# Altium PCB nrf24l01_cell(P40).PcbDoc (part 4 of 11)
Units mm, origin at the board's own origin, x right, y up, seen from the top; angles counter-clockwise.
Board outline 136.2 x 112.2 mm, 2 copper layers (TopLayer, BottomLayer); 520 components, 0 nets, 2804 pads, 1040 vias.
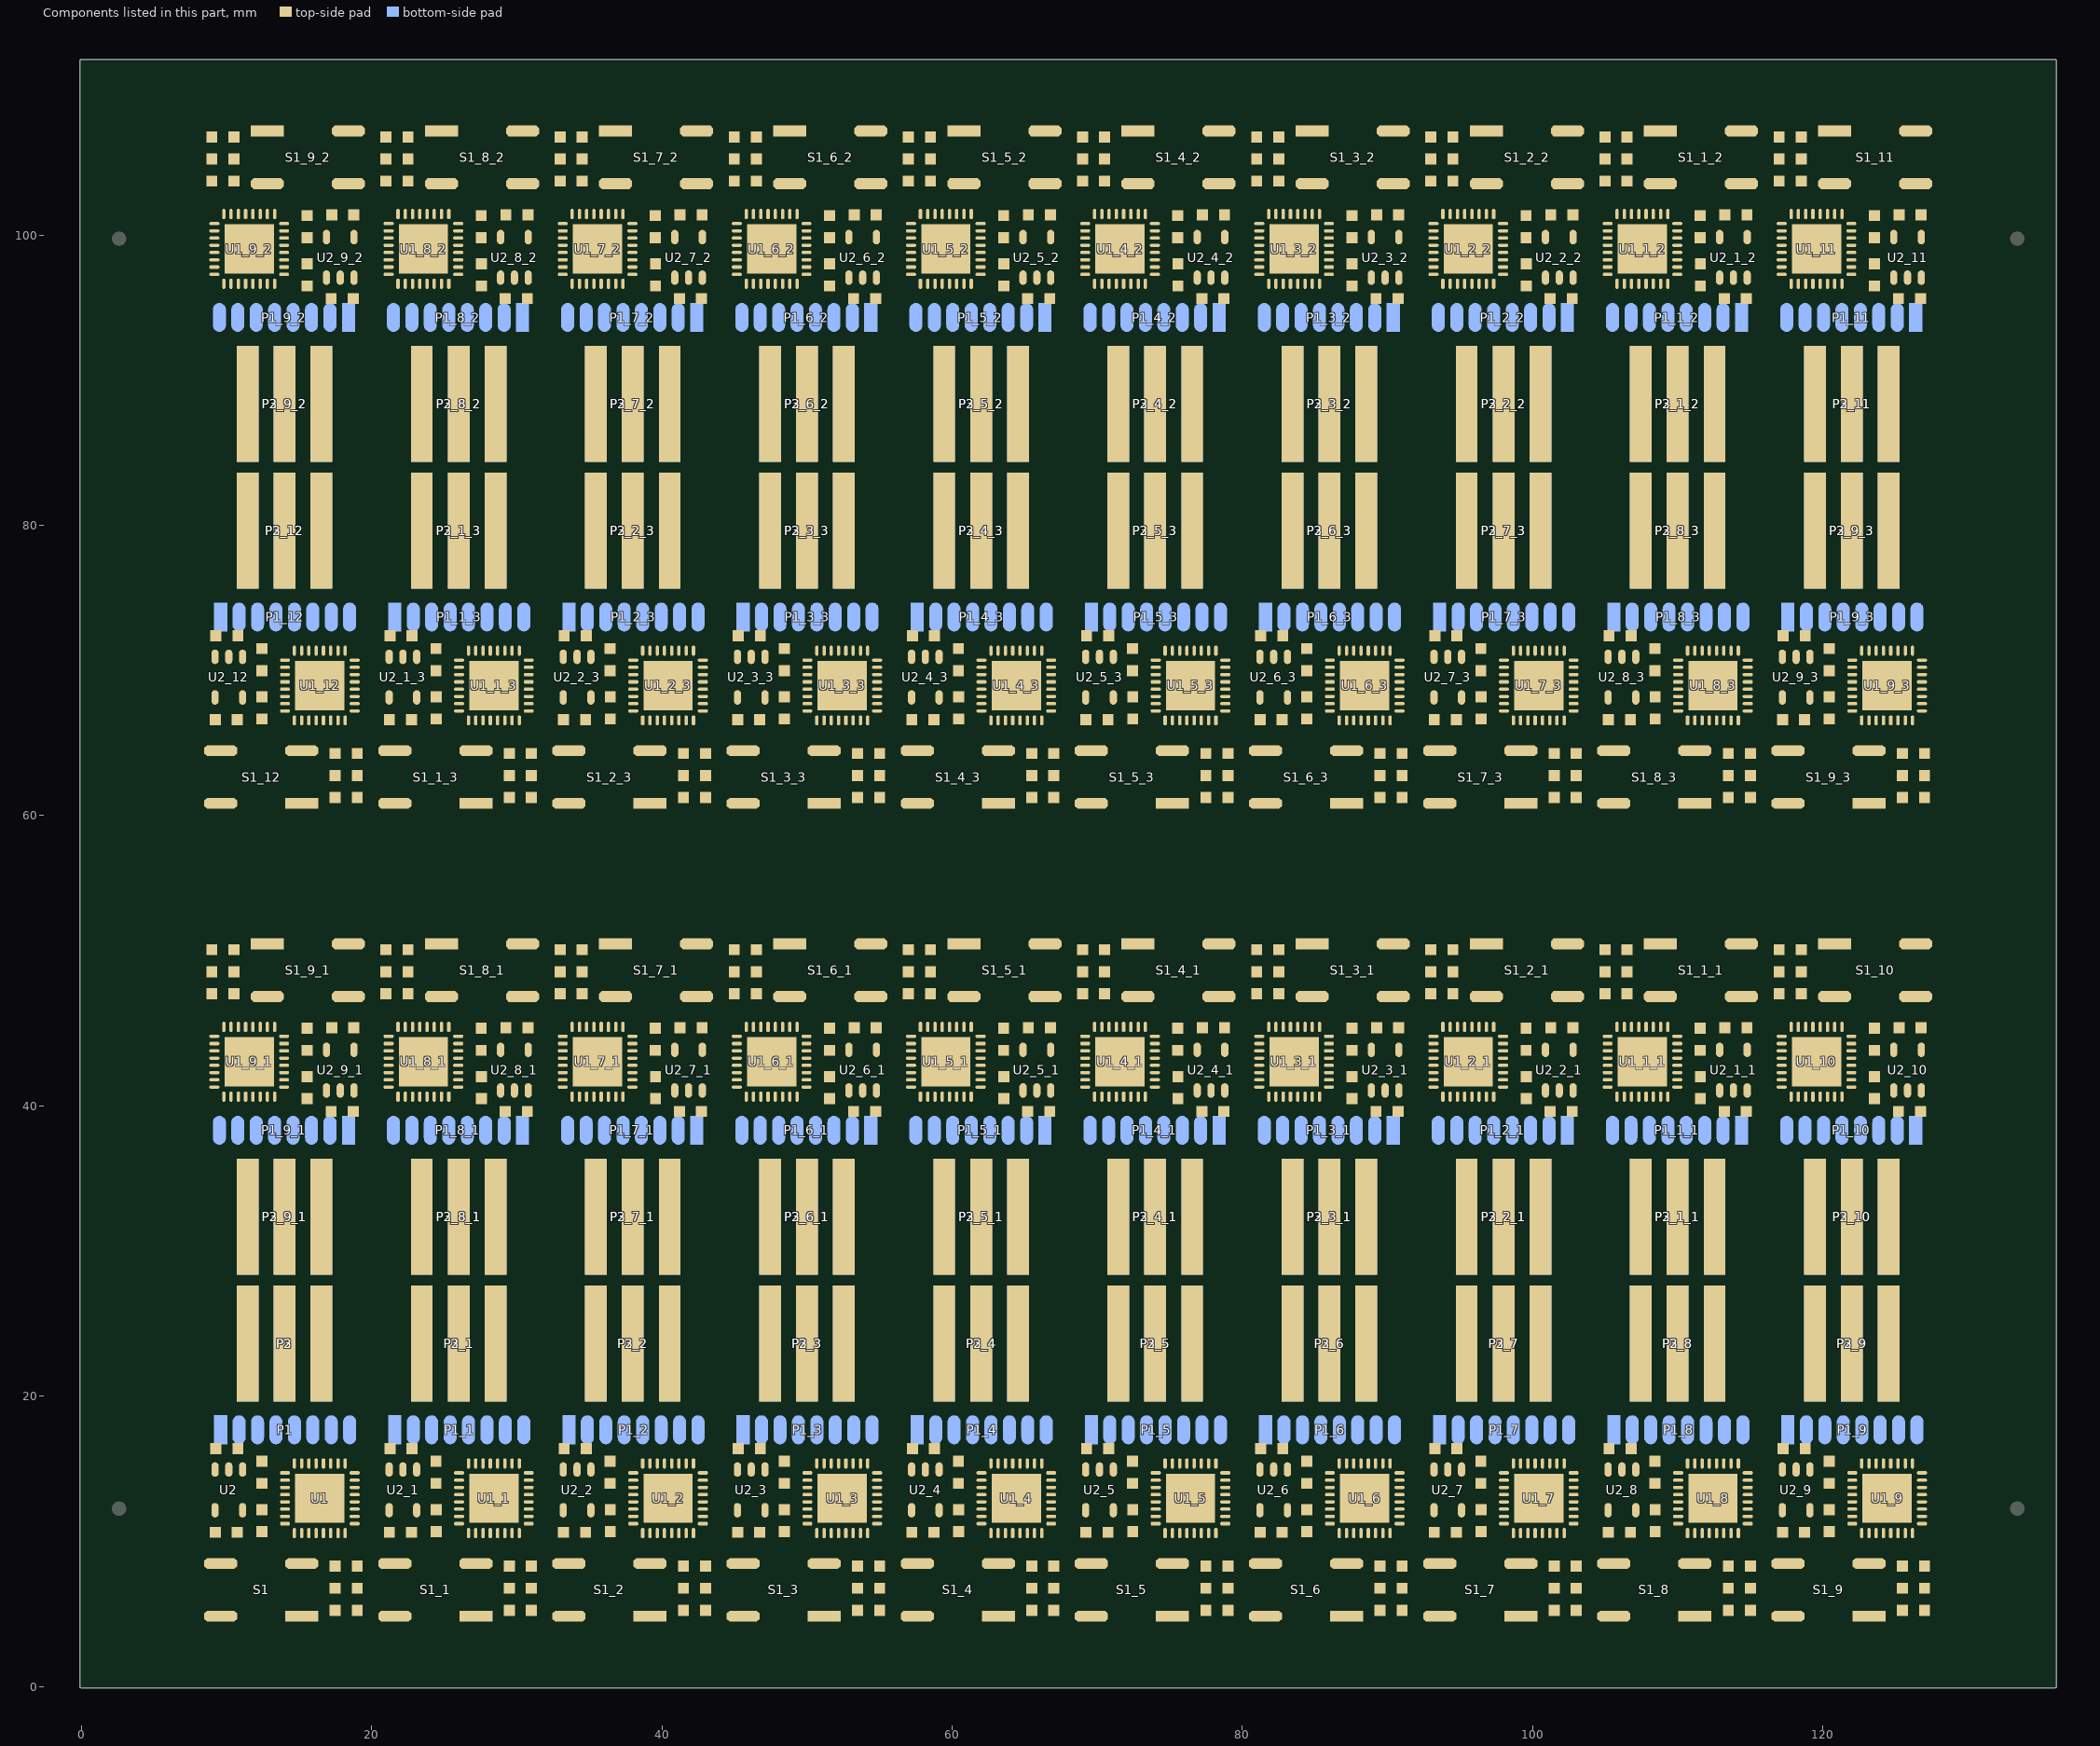
[diagram p4: the components of this part, seen from the top]

## Via types
v1: diameter 0.4, hole 0.2, TopLayer to BottomLayer, tented both sides, 1040 vias

## Nets (pads, with @x,y where several pads share a name; then routed paths per layer and width w, separated by ;. In a path a pad name is that pad's centre, name@x,y a point inside that pad or via, vN(x,y) a via of type N, cw(c..) or ccw(c..) an arc to the next point about the centre after c; other vN are vias at no path point) (continued)
copper on no net: (continued)
  TopLayer w0.203: 40.785,100.215 ccw(c40.532,100.468) 40.89,100.468 ccw(c41.248,100.468) 40.995,100.215 ; 40.89,43.86 40.89,44.56 ; 40.89,44.484 cw(c41.557,44.484) 41.341,45.116 ; 40.89,44.769 cw(c41.46,44.769) 41.275,45.308 ; 40.89,45.054 cw(c41.362,45.054) 41.209,45.5 ; 40.89,99.86 40.89,100.56 ; 40.89,100.484 cw(c41.557,100.484) 41.341,101.116 ; 40.89,100.769 cw(c41.46,100.769) 41.275,101.308 ; 40.89,101.054 cw(c41.362,101.054) 41.209,101.5 ; 40.985,20.38 ccw(c42.567,20.38) 41.448,19.262 ; 40.985,76.38 ccw(c42.567,76.38) 41.448,75.262 ; v1@41.042,37.37 ccw(c40.804,37.37) 40.972,37.538 ccw(c41.14,37.706) v1@41.14,37.468 ; v1@41.042,93.37 ccw(c40.804,93.37) 40.972,93.538 ccw(c41.14,93.706) v1@41.14,93.468 ; 41.188,20.38 ccw(c43.261,20.38) 41.795,18.915 ; 41.188,35.62 cw(c41.981,35.62) 41.421,36.181 ; 41.188,76.38 ccw(c43.261,76.38) 41.795,74.915 ; 41.188,91.62 cw(c41.981,91.62) 41.421,92.181 ; 41.25,45.38 40.89,45.02 40.89,44.56 ; 41.25,101.38 40.89,101.02 40.89,100.56 ; 41.288,8.082 ccw(c40.811,7.605) 40.811,8.28 ccw(c40.811,8.955) 41.288,8.478 ; 41.288,64.082 ccw(c40.811,63.605) 40.811,64.28 ccw(c40.811,64.955) 41.288,64.478 ; 41.49,6.76 42.21,7.48 42.21,9.16 41.68,9.69 41.68,10.56 ; 41.49,7.039 ccw(c41.49,7.714) 41.967,7.237 ccw(c42.444,6.76) 41.769,6.76 ; 41.49,62.76 42.21,63.48 42.21,65.16 41.68,65.69 41.68,66.56 ; 41.49,63.039 ccw(c41.49,63.714) 41.967,63.237 ccw(c42.444,62.76) 41.769,62.76 ; 42.18,15.36 42.18,16.579 40.311,18.447 36.91,18.447 36.717,18.64 v1@36.19,18.64 ; 42.18,71.36 42.18,72.579 40.311,74.447 36.91,74.447 36.717,74.64 v1@36.19,74.64 ; 42.536,39.422 cw(c42.059,38.945) 42.734,38.945 cw(c43.409,38.945) 42.932,39.422 ; 42.536,39.818 ccw(c42.059,40.295) 42.734,40.295 ccw(c43.409,40.295) 42.932,39.818 ; 42.536,95.422 cw(c42.059,94.945) 42.734,94.945 cw(c43.409,94.945) 42.932,95.422 ; 42.536,95.818 ccw(c42.059,96.295) 42.734,96.295 ccw(c43.409,96.295) 42.932,95.818 ; 42.685,41.415 ccw(c42.432,41.668) 42.79,41.668 ccw(c43.148,41.668) 42.895,41.415 ; 42.685,97.415 ccw(c42.432,97.668) 42.79,97.668 ccw(c43.148,97.668) 42.895,97.415 ; 42.734,40.317 cw(c43.283,40.317) 42.895,40.705 ; 42.734,96.317 cw(c43.283,96.317) 42.895,96.705 ; 42.812,8.478 ccw(c42.335,8.955) 43.01,8.955 ccw(c43.685,8.955) 43.208,8.478 ; 42.812,64.478 ccw(c42.335,64.955) 43.01,64.955 ccw(c43.685,64.955) 43.208,64.478 ; 42.83,11.21 42.83,10.52 43.01,10.34 43.01,8.28 ; 42.83,12.21 v1(43.45,12.21) v1@43.52,12.21 ; 42.83,67.21 42.83,66.52 43.01,66.34 43.01,64.28 ; 42.83,68.21 v1(43.45,68.21) v1@43.52,68.21 ; v1@42.92,9.72 cw(c42.704,9.504) 43.01,9.504 ; v1@42.92,9.86 ccw(c42.704,10.076) 43.01,10.076 ; v1@42.92,65.72 cw(c42.704,65.504) 43.01,65.504 ; v1@42.92,65.86 ccw(c42.704,66.076) 43.01,66.076 ; v1@43.212,38.07 cw(c42.974,38.07) 43.142,37.902 cw(c43.31,37.734) v1@43.31,37.972 ; v1@43.212,94.07 cw(c42.974,94.07) 43.142,93.902 cw(c43.31,93.734) v1@43.31,93.972 ; v1@43.38,12.14 ccw(c43.212,11.972) 43.212,12.21 ccw(c43.212,12.448) v1@43.38,12.28 ; v1@43.38,17.85 ccw(c43.212,17.682) 43.212,17.92 ccw(c43.212,18.158) v1@43.38,17.99 ; v1@43.38,68.14 ccw(c43.212,67.972) 43.212,68.21 ccw(c43.212,68.448) v1@43.38,68.28 ; v1@43.38,73.85 ccw(c43.212,73.682) 43.212,73.92 ccw(c43.212,74.158) v1@43.38,73.99 ; v1@44.48,43.79 v1(44.55,43.79) 45.17,43.79 ; v1@44.48,99.79 v1(44.55,99.79) 45.17,99.79 ; v1(44.55,38.08) 45.21,38.08 47.46,35.83 ; v1(44.55,94.08) 45.21,94.08 47.46,91.83 ; v1@44.62,38.01 cw(c44.788,37.842) 44.788,38.08 cw(c44.788,38.318) v1@44.62,38.15 ; v1@44.62,43.72 cw(c44.788,43.552) 44.788,43.79 cw(c44.788,44.028) v1@44.62,43.86 ; v1@44.62,94.01 cw(c44.788,93.842) 44.788,94.08 cw(c44.788,94.318) v1@44.62,94.15 ; v1@44.62,99.72 cw(c44.788,99.552) 44.788,99.79 cw(c44.788,100.028) v1@44.62,99.86 ; v1(44.69,17.93) 47.46,20.7 ; v1@44.69,18.028 ccw(c44.69,18.266) 44.858,18.098 ccw(c45.026,17.93) v1@44.788,17.93 ; v1(44.69,73.93) 47.46,76.7 ; v1@44.69,74.028 ccw(c44.69,74.266) 44.858,74.098 ccw(c45.026,73.93) v1@44.788,73.93 ; 44.792,47.522 cw(c44.315,47.045) 44.99,47.045 cw(c45.665,47.045) 45.188,47.522 ; 44.792,103.522 cw(c44.315,103.045) 44.99,103.045 cw(c45.665,103.045) 45.188,103.522 ; 44.99,45.924 cw(c45.296,45.924) v1@45.08,46.14 ; 44.99,46.496 ccw(c45.296,46.496) v1@45.08,46.28 ; 44.99,47.72 44.99,45.66 45.17,45.48 45.17,44.79 ; 44.99,101.924 cw(c45.296,101.924) v1@45.08,102.14 ; 44.99,102.496 ccw(c45.296,102.496) v1@45.08,102.28 ; 44.99,103.72 44.99,101.66 45.17,101.48 45.17,100.79 ; 45.068,16.182 cw(c44.591,15.705) 45.266,15.705 cw(c45.941,15.705) 45.464,16.182 ; 45.068,16.578 ccw(c44.591,17.055) 45.266,17.055 ccw(c45.941,17.055) 45.464,16.578 ; 45.068,72.182 cw(c44.591,71.705) 45.266,71.705 cw(c45.941,71.705) 45.464,72.182 ; 45.068,72.578 ccw(c44.591,73.055) 45.266,73.055 ccw(c45.941,73.055) 45.464,72.578 ; 45.105,14.585 cw(c44.852,14.332) 45.21,14.332 cw(c45.568,14.332) 45.315,14.585 ; 45.105,15.295 ccw(c44.717,15.683) 45.266,15.683 ; 45.105,70.585 cw(c44.852,70.332) 45.21,70.332 cw(c45.568,70.332) 45.315,70.585 ; 45.105,71.295 ccw(c44.717,71.683) 45.266,71.683 ; 45.17,41.29 45.17,39.497 47.52,37.146 48.488,37.146 48.96,36.675 51.165,36.675 v1(51.21,36.63) ; 45.17,41.79 44.69,41.79 44.48,41.58 44.48,39.612 47.352,36.74 48.32,36.74 50,35.06 50,32.37 ; 45.17,97.29 45.17,95.497 47.52,93.146 48.488,93.146 48.96,92.675 51.165,92.675 v1(51.21,92.63) ; 45.17,97.79 44.69,97.79 44.48,97.58 44.48,95.612 47.352,92.74 48.32,92.74 50,91.06 50,88.37 ; 45.807,19.047 cw(c47.46,17.394) 47.46,19.732 ; 45.807,75.047 cw(c47.46,73.394) 47.46,75.732 ; 45.82,40.64 45.82,39.421 47.689,37.553 51.09,37.553 51.283,37.36 v1@51.81,37.36 ; 45.82,96.64 45.82,95.421 47.689,93.553 51.09,93.553 51.283,93.36 v1@51.81,93.36 ; 46.154,19.394 cw(c47.46,18.087) 47.46,19.935 ; 46.154,75.394 cw(c47.46,74.087) 47.46,75.935 ; 46.205,37.085 cw(c44.739,35.62) 46.812,35.62 ; 46.205,93.085 cw(c44.739,91.62) 46.812,91.62 ; 46.231,49.24 cw(c45.556,49.24) 46.033,48.763 cw(c46.51,48.286) 46.51,48.961 ; 46.231,105.24 cw(c45.556,105.24) 46.033,104.763 cw(c46.51,104.286) 46.51,104.961 ; 46.32,40.64 46.32,39.496 47.841,37.975 49.995,37.975 50.08,38.06 v1(50.57,38.06) ; 46.32,45.44 46.32,46.31 45.79,46.84 45.79,48.52 46.51,49.24 ; 46.32,96.64 46.32,95.496 47.841,93.975 49.995,93.975 50.08,94.06 v1(50.57,94.06) ; 46.32,101.44 46.32,102.31 45.79,102.84 45.79,104.52 46.51,105.24 ; 46.501,19.741 cw(c47.46,18.781) 47.46,20.138 ; 46.501,75.741 cw(c47.46,74.781) 47.46,76.138 ; 46.514,47.72 48.62,47.72 ; 46.514,103.72 48.62,103.72 ; 46.552,36.738 cw(c45.433,35.62) 47.015,35.62 ; 46.552,92.738 cw(c45.433,91.62) 47.015,91.62 ; 46.579,19.819 ccw(c46.019,20.38) 46.812,20.38 ; 46.579,75.819 ccw(c46.019,76.38) 46.812,76.38 ; 46.659,10.884 ccw(c46.443,11.516) 47.11,11.516 ; 46.659,66.884 ccw(c46.443,67.516) 47.11,67.516 ; 46.712,36.578 ccw(c47.46,37.327) 47.46,36.268 ; 46.712,47.522 cw(c47.189,47.045) 47.189,47.72 cw(c47.189,48.395) 46.712,47.918 ; 46.712,92.578 ccw(c47.46,93.327) 47.46,92.268 ; 46.712,103.522 cw(c47.189,103.045) 47.189,103.72 cw(c47.189,104.395) 46.712,103.918 ; 46.725,10.692 ccw(c46.54,11.231) 47.11,11.231 ; 46.725,66.692 ccw(c46.54,67.231) 47.11,67.231 ; 46.75,10.62 47.11,10.98 47.11,11.44 ; 46.75,66.62 47.11,66.98 47.11,67.44 ; 46.791,10.5 ccw(c46.638,10.946) 47.11,10.946 ; 46.791,66.5 ccw(c46.638,66.946) 47.11,66.946 ; 46.82,40.64 46.82,39.71 v1(48.05,38.48) ; 46.82,96.64 46.82,95.71 v1(48.05,94.48) ; v1@46.86,18.532 cw(c46.86,18.294) 47.028,18.462 cw(c47.196,18.63) v1@46.958,18.63 ; v1(46.86,18.63) 48.07,17.42 50.076,17.42 50.481,17.015 51.09,17.015 52.18,15.925 52.18,15.36 ; v1@46.86,74.532 cw(c46.86,74.294) 47.028,74.462 cw(c47.196,74.63) v1@46.958,74.63 ; v1(46.86,74.63) 48.07,73.42 50.076,73.42 50.481,73.015 51.09,73.015 52.18,71.925 52.18,71.36 ; 46.898,36.392 cw(c46.127,35.62) 47.218,35.62 ; 46.898,92.392 cw(c46.127,91.62) 47.218,91.62 ; 46.916,47.72 cw(c46.916,46.398) 47.85,47.333 ; 46.916,103.72 cw(c46.916,102.398) 47.85,103.333 ; 47.005,11.785 cw(c46.752,11.532) 47.11,11.532 cw(c47.468,11.532) 47.215,11.785 ; 47.005,14.585 cw(c46.752,14.332) 47.11,14.332 cw(c47.468,14.332) 47.215,14.585 ; 47.005,67.785 cw(c46.752,67.532) 47.11,67.532 cw(c47.468,67.532) 47.215,67.785 ; 47.005,70.585 cw(c46.752,70.332) 47.11,70.332 cw(c47.468,70.332) 47.215,70.585 ; 47.11,12.14 47.11,11.44 ; 47.11,14.94 47.11,14.14 46.94,13.97 45.4,13.97 45.21,14.16 45.21,14.94 45.266,14.996 45.266,16.38 45.266,17.75 46.578,19.062 46.656,19.14 v1(47.46,19.14) ; 47.11,68.14 47.11,67.44 ; 47.11,70.94 47.11,70.14 46.94,69.97 45.4,69.97 45.21,70.16 45.21,70.94 45.266,70.996 45.266,72.38 45.266,73.75 46.578,75.062 46.656,75.14 v1(47.46,75.14) ; 47.32,40.64 47.32,40 48.335,38.985 48.84,38.48 v1(49.31,38.48) ; 47.32,96.64 47.32,96 48.335,94.985 48.84,94.48 v1(49.31,94.48) ; v1@47.39,19.07 ccw(c47.222,18.902) 47.222,19.14 ccw(c47.222,19.378) v1@47.39,19.21 ; v1@47.39,75.07 ccw(c47.222,74.902) 47.222,75.14 ccw(c47.222,75.378) v1@47.39,75.21 ; 47.407,47.72 cw(c47.407,46.889) 47.994,47.477 ; 47.407,103.72 cw(c47.407,102.889) 47.994,103.477 ; 47.82,40.64 47.82,40.075 48.91,38.985 49.519,38.985 49.924,38.58 51.93,38.58 v1(53.14,37.37) ; 47.82,96.64 47.82,96.075 48.91,94.985 49.519,94.985 49.924,94.58 51.93,94.58 v1(53.14,93.37) ; v1@47.952,38.48 ccw(c47.714,38.48) 47.882,38.648 ccw(c48.05,38.816) v1@48.05,38.578 ; v1@47.952,94.48 ccw(c47.714,94.48) 47.882,94.648 ccw(c48.05,94.816) v1@48.05,94.578 ; v1@48.11,18.72 v1@48.19,18.64 ; v1@48.11,74.72 v1@48.19,74.64 ; v1(48.12,18.64) v1@48.19,18.64 ; v1(48.12,74.64) v1@48.19,74.64 ; v1@48.19,18.57 cw(c48.358,18.402) 48.358,18.64 cw(c48.358,18.878) v1@48.19,18.71 ; v1@48.19,74.57 cw(c48.358,74.402) 48.358,74.64 cw(c48.358,74.878) v1@48.19,74.71 ; 48.256,12.381 ccw(c47.81,12.84) 48.45,12.84 ; 48.256,68.381 ccw(c47.81,68.84) 48.45,68.84 ; 48.44,15.41 49.2,16.17 50.786,16.17 51.18,15.776 51.18,15.36 ; 48.44,15.789 ccw(c48.44,16.705) 49.088,16.058 ; 48.44,71.41 49.2,72.17 50.786,72.17 51.18,71.776 51.18,71.36 ; 48.44,71.789 ccw(c48.44,72.705) 49.088,72.058 ; 48.45,12.18 48.45,12.84 ; 48.45,68.18 48.45,68.84 ; 48.644,12.381 cw(c49.09,12.84) 48.45,12.84 ; 48.644,68.381 cw(c49.09,68.84) 48.45,68.84 ; 48.719,15.51 cw(c49.153,15.51) 48.846,15.816 ; 48.719,71.51 cw(c49.153,71.51) 48.846,71.816 ; v1(48.79,19.37) 48.835,19.325 51.04,19.325 51.512,18.854 52.48,18.854 54.83,16.503 54.83,14.71 ; v1(48.79,75.37) 48.835,75.325 51.04,75.325 51.512,74.854 52.48,74.854 54.83,72.503 54.83,70.71 ; 48.82,40.64 48.82,40.224 49.214,39.83 50.8,39.83 51.56,40.59 ; 48.82,96.64 48.82,96.224 49.214,95.83 50.8,95.83 51.56,96.59 ; 48.833,40.405 ccw(c49.302,40.405) 48.971,40.073 ; 48.833,96.405 ccw(c49.302,96.405) 48.971,96.073 ; v1@48.86,19.44 ccw(c49.136,19.716) 49.136,19.325 ; v1@48.86,75.44 ccw(c49.136,75.716) 49.136,75.325 ; v1@49.18,14.01 ccw(c49.012,14.178) 49.25,14.178 ccw(c49.488,14.178) v1@49.32,14.01 ; v1@49.18,70.01 ccw(c49.012,70.178) 49.25,70.178 ccw(c49.488,70.178) v1@49.32,70.01 ; v1@49.195,12.564 cw(c49.545,12.219) 49.545,12.71 ; v1@49.195,68.564 cw(c49.545,68.219) 49.545,68.71 ; v1@49.2,12.42 cw(c49.057,12.277) 49.26,12.277 ; v1@49.2,68.42 cw(c49.057,68.277) 49.26,68.277 ; v1@49.24,38.41 ccw(c49.072,38.242) 49.072,38.48 ccw(c49.072,38.718) v1@49.24,38.55 ; v1@49.24,94.41 ccw(c49.072,94.242) 49.072,94.48 ccw(c49.072,94.718) v1@49.24,94.55 ; v1(49.25,13.94) 49.25,14.55 49.41,14.71 50.03,14.71 ; v1(49.25,69.94) 49.25,70.55 49.41,70.71 50.03,70.71 ; 49.26,12.228 cw(c49.532,12.228) v1@49.34,12.42 ; v1@49.26,12.49 49.26,11.59 49.11,11.44 47.11,11.44 ; v1@49.26,12.53 49.44,12.71 50.03,12.71 ccw(c50.03,11.742) v1@49.34,12.421 ; 49.26,68.228 cw(c49.532,68.228) v1@49.34,68.42 ; v1@49.26,68.49 49.26,67.59 49.11,67.44 47.11,67.44 ; v1@49.26,68.53 49.44,68.71 50.03,68.71 ccw(c50.03,67.742) v1@49.34,68.421 ; v1@49.366,12.512 cw(c49.545,12.555) 49.415,12.685 ; v1@49.366,68.512 cw(c49.545,68.555) 49.415,68.685 ; v1(49.43,17.94) 49.92,17.94 50.005,18.025 52.159,18.025 53.68,16.504 53.68,15.36 ; v1(49.43,73.94) 49.92,73.94 50.005,74.025 52.159,74.025 53.68,72.504 53.68,71.36 ; v1@49.5,17.87 cw(c49.668,17.702) 49.668,17.94 cw(c49.668,18.178) v1@49.5,18.01 ; v1@49.5,73.87 cw(c49.668,73.702) 49.668,73.94 cw(c49.668,74.178) v1@49.5,74.01 ; v1@49.9,45.21 cw(c49.732,45.042) 49.97,45.042 cw(c50.208,45.042) v1@50.04,45.21 ; v1@49.9,101.21 cw(c49.732,101.042) 49.97,101.042 cw(c50.208,101.042) v1@50.04,101.21 ; v1@49.96,10.79 ccw(c49.792,10.958) 50.03,10.958 ccw(c50.268,10.958) v1@50.1,10.79 ; v1@49.96,66.79 ccw(c49.792,66.958) 50.03,66.958 ccw(c50.268,66.958) v1@50.1,66.79 ; 49.97,41.29 50.59,41.29 50.75,41.45 v1(50.75,42.06) ; 49.97,42.79 51.18,42.79 51.55,43.16 ; 49.97,43.29 50.56,43.29 v1@50.74,43.47 ; 49.97,44.79 v1(49.97,45.28) ; 49.97,97.29 50.59,97.29 50.75,97.45 v1(50.75,98.06) ; 49.97,98.79 51.18,98.79 51.55,99.16 ; 49.97,99.29 50.56,99.29 v1@50.74,99.47 ; 49.97,100.79 v1(49.97,101.28) ; 49.97,43.29 ccw(c49.97,44.258) 50.66,43.579 ccw(c50.468,43.772) 50.74,43.772 ; 49.97,99.29 ccw(c49.97,100.258) v1@50.66,99.579 ; 50,23.63 50,20.94 51.68,19.26 52.648,19.26 55.52,16.388 55.52,14.42 55.31,14.21 54.83,14.21 ; 50,79.63 50,76.94 51.68,75.26 52.648,75.26 55.52,72.388 55.52,70.42 55.31,70.21 54.83,70.21 ; v1(50.03,10.72) 50.03,11.21 ; 50.03,13.21 48.82,13.21 48.45,12.84 ; v1(50.03,66.72) 50.03,67.21 ; 50.03,69.21 48.82,69.21 48.45,68.84 ; 50.455,43.29 ccw(c50.455,43.781) v1@50.805,43.436 ; 50.455,99.29 ccw(c50.455,99.781) v1@50.805,99.436 ; v1@50.5,37.99 ccw(c50.332,37.822) 50.332,38.06 ccw(c50.332,38.298) v1@50.5,38.13 ; v1@50.5,93.99 ccw(c50.332,93.822) 50.332,94.06 ccw(c50.332,94.298) v1@50.5,94.13 ; 50.585,43.315 ccw(c50.455,43.445) v1@50.634,43.488 ; 50.585,99.315 ccw(c50.455,99.445) v1@50.634,99.488 ; v1@50.66,99.58 ccw(c50.468,99.772) 50.74,99.772 ; v1@50.68,41.99 cw(c50.512,41.822) 50.75,41.822 cw(c50.988,41.822) v1@50.82,41.99 ; v1@50.68,97.99 cw(c50.512,97.822) 50.75,97.822 cw(c50.988,97.822) v1@50.82,97.99 ; v1(50.69,17.52) 51.16,17.52 51.665,17.015 52.68,16 52.68,15.36 ; v1(50.69,73.52) 51.16,73.52 51.665,73.015 52.68,72 52.68,71.36 ; v1@50.74,43.51 50.74,44.41 50.89,44.56 52.89,44.56 ; 50.74,43.723 ccw(c50.943,43.723) v1@50.8,43.58 ; v1@50.74,99.51 50.74,100.41 50.89,100.56 52.89,100.56 ; 50.74,99.723 ccw(c50.943,99.723) v1@50.8,99.58 ; v1@50.76,17.45 cw(c50.928,17.282) 50.928,17.52 cw(c50.928,17.758) v1@50.76,17.59 ; v1@50.76,73.45 cw(c50.928,73.282) 50.928,73.52 cw(c50.928,73.758) v1@50.76,73.59 ; 50.864,36.675 cw(c50.864,36.284) v1@51.14,36.56 ; 50.864,92.675 cw(c50.864,92.284) v1@51.14,92.56 ; 50.912,39.942 cw(c51.56,39.295) 51.56,40.211 ; 50.912,95.942 cw(c51.56,95.295) 51.56,96.211 ; 51.029,15.927 cw(c50.698,15.595) 51.167,15.595 ; 51.029,71.927 cw(c50.698,71.595) 51.167,71.595 ; 51.154,40.184 ccw(c50.847,40.49) 51.281,40.49 ; 51.154,96.184 ccw(c50.847,96.49) 51.281,96.49 ; 51.356,43.619 cw(c50.91,43.16) 51.55,43.16 ; 51.356,99.619 cw(c50.91,99.16) 51.55,99.16 ; 51.38,8.28 53.486,8.28 ; 51.379,64.28 53.486,64.28 ; 51.55,43.82 51.55,43.16 ; 51.55,99.82 51.55,99.16 ; 51.744,43.619 ccw(c52.19,43.16) 51.55,43.16 ; 51.744,99.619 ccw(c52.19,99.16) 51.55,99.16 ; v1@51.81,37.29 ccw(c51.642,37.122) 51.642,37.36 ccw(c51.642,37.598) v1@51.81,37.43 ; v1@51.81,93.29 ccw(c51.642,93.122) 51.642,93.36 ccw(c51.642,93.598) v1@51.81,93.43 ; v1(51.88,37.36) v1@51.81,37.36 ; v1(51.88,93.36) v1@51.81,93.36 ; v1@51.89,37.28 v1@51.81,37.36 ; v1@51.89,93.28 v1@51.81,93.36 ; v1@51.95,17.422 cw(c51.95,17.184) 52.118,17.352 cw(c52.286,17.52) v1@52.048,17.52 ; v1(51.95,17.52) 53.18,16.29 53.18,15.36 ; v1@51.95,73.422 cw(c51.95,73.184) 52.118,73.352 cw(c52.286,73.52) v1@52.048,73.52 ; v1(51.95,73.52) 53.18,72.29 53.18,71.36 ; 52.006,8.523 ccw(c52.593,9.111) 52.593,8.28 ; 52.006,64.523 ccw(c52.593,65.111) 52.593,64.28 ; 52.15,8.667 ccw(c53.084,9.602) 53.084,8.28 ; 52.15,64.667 ccw(c53.084,65.602) 53.084,64.28 ; 52.54,19.732 cw(c52.54,18.673) 53.288,19.422 ; 52.54,20.17 54.79,17.92 v1(55.45,17.92) ; 52.54,35.3 v1(55.31,38.07) ; 52.54,35.862 ccw(c52.54,37.219) 53.499,36.259 ; 52.54,36.065 ccw(c52.54,37.913) 53.846,36.606 ; 52.54,36.268 ccw(c52.54,38.606) 54.193,36.953 ; v1(52.54,36.86) 53.344,36.86 53.422,36.938 54.734,38.25 54.734,39.62 54.734,41.004 54.79,41.06 54.79,41.84 54.6,42.03 53.06,42.03 52.89,41.86 52.89,41.06 ; 52.54,75.732 cw(c52.54,74.673) 53.288,75.422 ; 52.54,76.17 54.79,73.92 v1(55.45,73.92) ; 52.54,91.3 v1(55.31,94.07) ; 52.54,91.862 ccw(c52.54,93.219) 53.499,92.259 ; 52.54,92.065 ccw(c52.54,93.913) 53.846,92.606 ; 52.54,92.268 ccw(c52.54,94.606) 54.193,92.953 ; v1(52.54,92.86) 53.344,92.86 53.422,92.938 54.734,94.25 54.734,95.62 54.734,97.004 54.79,97.06 54.79,97.84 54.6,98.03 53.06,98.03 52.89,97.86 52.89,97.06 ; v1@52.61,36.79 cw(c52.778,36.622) 52.778,36.86 cw(c52.778,37.098) v1@52.61,36.93 ; v1@52.61,92.79 cw(c52.778,92.622) 52.778,92.86 cw(c52.778,93.098) v1@52.61,92.93 ; 52.782,20.38 ccw(c53.873,20.38) 53.102,19.608 ; 52.782,76.38 ccw(c53.873,76.38) 53.102,75.608 ; 52.785,41.415 ccw(c52.532,41.668) 52.89,41.668 ccw(c53.248,41.668) 52.995,41.415 ; 52.785,44.215 ccw(c52.532,44.468) 52.89,44.468 ccw(c53.248,44.468) 52.995,44.215 ; 52.785,97.415 ccw(c52.532,97.668) 52.89,97.668 ccw(c53.248,97.668) 52.995,97.415 ; 52.785,100.215 ccw(c52.532,100.468) 52.89,100.468 ccw(c53.248,100.468) 52.995,100.215 ; 52.89,43.86 52.89,44.56 ; 52.89,44.484 cw(c53.557,44.484) 53.341,45.116 ; 52.89,44.769 cw(c53.46,44.769) 53.275,45.308 ; 52.89,45.054 cw(c53.362,45.054) 53.209,45.5 ; 52.89,99.86 52.89,100.56 ; 52.89,100.484 cw(c53.557,100.484) 53.341,101.116 ; 52.89,100.769 cw(c53.46,100.769) 53.275,101.308 ; 52.89,101.054 cw(c53.362,101.054) 53.209,101.5 ; 52.985,20.38 ccw(c54.567,20.38) 53.448,19.262 ; 52.985,76.38 ccw(c54.567,76.38) 53.448,75.262 ; v1@53.042,37.37 ccw(c52.804,37.37) 52.972,37.538 ccw(c53.14,37.706) v1@53.14,37.468 ; v1@53.042,93.37 ccw(c52.804,93.37) 52.972,93.538 ccw(c53.14,93.706) v1@53.14,93.468 ; 53.188,20.38 ccw(c55.261,20.38) 53.795,18.915 ; 53.188,35.62 cw(c53.981,35.62) 53.421,36.181 ; 53.188,76.38 ccw(c55.261,76.38) 53.795,74.915 ; 53.188,91.62 cw(c53.981,91.62) 53.421,92.181 ; 53.25,45.38 52.89,45.02 52.89,44.56 ; 53.25,101.38 52.89,101.02 52.89,100.56 ; 53.288,8.082 ccw(c52.811,7.605) 52.811,8.28 ccw(c52.811,8.955) 53.288,8.478 ; 53.288,64.082 ccw(c52.811,63.605) 52.811,64.28 ccw(c52.811,64.955) 53.288,64.478 ; 53.49,6.76 54.21,7.48 54.21,9.16 53.68,9.69 53.68,10.56 ; 53.49,7.039 ccw(c53.49,7.714) 53.967,7.237 ccw(c54.444,6.76) 53.769,6.76 ; 53.49,62.76 54.21,63.48 54.21,65.16 53.68,65.69 53.68,66.56 ; 53.49,63.039 ccw(c53.49,63.714) 53.967,63.237 ccw(c54.444,62.76) 53.769,62.76 ; 54.18,15.36 54.18,16.579 52.311,18.447 48.91,18.447 48.717,18.64 v1@48.19,18.64 ; 54.18,71.36 54.18,72.579 52.311,74.447 48.91,74.447 48.717,74.64 v1@48.19,74.64 ; 54.536,39.422 cw(c54.059,38.945) 54.734,38.945 cw(c55.409,38.945) 54.932,39.422 ; 54.536,39.818 ccw(c54.059,40.295) 54.734,40.295 ccw(c55.409,40.295) 54.932,39.818 ; 54.536,95.422 cw(c54.059,94.945) 54.734,94.945 cw(c55.409,94.945) 54.932,95.422 ; 54.536,95.818 ccw(c54.059,96.295) 54.734,96.295 ccw(c55.409,96.295) 54.932,95.818 ; 54.685,41.415 ccw(c54.432,41.668) 54.79,41.668 ccw(c55.148,41.668) 54.895,41.415 ; 54.685,97.415 ccw(c54.432,97.668) 54.79,97.668 ccw(c55.148,97.668) 54.895,97.415 ; 54.734,40.317 cw(c55.283,40.317) 54.895,40.705 ; 54.734,96.317 cw(c55.283,96.317) 54.895,96.705 ; 54.812,8.478 ccw(c54.335,8.955) 55.01,8.955 ccw(c55.685,8.955) 55.208,8.478 ; 54.812,64.478 ccw(c54.335,64.955) 55.01,64.955 ccw(c55.685,64.955) 55.208,64.478 ; 54.83,11.21 54.83,10.52 55.01,10.34 55.01,8.28 ; 54.83,12.21 v1(55.45,12.21) v1@55.52,12.21 ; 54.83,67.21 54.83,66.52 55.01,66.34 55.01,64.28 ; 54.83,68.21 v1(55.45,68.21) v1@55.52,68.21 ; v1@54.92,9.72 cw(c54.704,9.504) 55.01,9.504 ; v1@54.92,9.86 ccw(c54.704,10.076) 55.01,10.076 ; v1@54.92,65.72 cw(c54.704,65.504) 55.01,65.504 ; v1@54.92,65.86 ccw(c54.704,66.076) 55.01,66.076 ; v1@55.212,38.07 cw(c54.974,38.07) 55.142,37.902 cw(c55.31,37.734) v1@55.31,37.972 ; v1@55.212,94.07 cw(c54.974,94.07) 55.142,93.902 cw(c55.31,93.734) v1@55.31,93.972 ; v1@55.38,12.14 ccw(c55.212,11.972) 55.212,12.21 ccw(c55.212,12.448) v1@55.38,12.28 ; v1@55.38,17.85 ccw(c55.212,17.682) 55.212,17.92 ccw(c55.212,18.158) v1@55.38,17.99 ; v1@55.38,68.14 ccw(c55.212,67.972) 55.212,68.21 ccw(c55.212,68.448) v1@55.38,68.28 ; v1@55.38,73.85 ccw(c55.212,73.682) 55.212,73.92 ccw(c55.212,74.158) v1@55.38,73.99 ; v1@56.48,43.79 v1(56.55,43.79) 57.17,43.79 ; v1@56.48,99.79 v1(56.55,99.79) 57.17,99.79 ; v1(56.55,38.08) 57.21,38.08 59.46,35.83 ; v1(56.55,94.08) 57.21,94.08 59.46,91.83 ; v1@56.62,38.01 cw(c56.788,37.842) 56.788,38.08 cw(c56.788,38.318) v1@56.62,38.15 ; v1@56.62,43.72 cw(c56.788,43.552) 56.788,43.79 cw(c56.788,44.028) v1@56.62,43.86 ; v1@56.62,94.01 cw(c56.788,93.842) 56.788,94.08 cw(c56.788,94.318) v1@56.62,94.15 ; v1@56.62,99.72 cw(c56.788,99.552) 56.788,99.79 cw(c56.788,100.028) v1@56.62,99.86 ; v1(56.69,17.93) 59.46,20.7 ; v1@56.69,18.028 ccw(c56.69,18.266) 56.858,18.098 ccw(c57.026,17.93) v1@56.788,17.93 ; v1(56.69,73.93) 59.46,76.7 ; v1@56.69,74.028 ccw(c56.69,74.266) 56.858,74.098 ccw(c57.026,73.93) v1@56.788,73.93 ; 56.792,47.522 cw(c56.315,47.045) 56.99,47.045 cw(c57.665,47.045) 57.188,47.522 ; 56.792,103.522 cw(c56.315,103.045) 56.99,103.045 cw(c57.665,103.045) 57.188,103.522 ; 56.99,45.924 cw(c57.296,45.924) v1@57.08,46.14 ; 56.99,46.496 ccw(c57.296,46.496) v1@57.08,46.28 ; 56.99,47.72 56.99,45.66 57.17,45.48 57.17,44.79 ; 56.99,101.924 cw(c57.296,101.924) v1@57.08,102.14 ; 56.99,102.496 ccw(c57.296,102.496) v1@57.08,102.28 ; 56.99,103.72 56.99,101.66 57.17,101.48 57.17,100.79 ; 57.068,16.182 cw(c56.591,15.705) 57.266,15.705 cw(c57.941,15.705) 57.464,16.182 ; 57.068,16.578 ccw(c56.591,17.055) 57.266,17.055 ccw(c57.941,17.055) 57.464,16.578 ; 57.068,72.182 cw(c56.591,71.705) 57.266,71.705 cw(c57.941,71.705) 57.464,72.182 ; 57.068,72.578 ccw(c56.591,73.055) 57.266,73.055 ccw(c57.941,73.055) 57.464,72.578 ; 57.105,14.585 cw(c56.852,14.332) 57.21,14.332 cw(c57.568,14.332) 57.315,14.585 ; 57.105,15.295 ccw(c56.717,15.683) 57.266,15.683 ; 57.105,70.585 cw(c56.852,70.332) 57.21,70.332 cw(c57.568,70.332) 57.315,70.585 ; 57.105,71.295 ccw(c56.717,71.683) 57.266,71.683 ; 57.17,41.29 57.17,39.497 59.52,37.146 60.488,37.146 60.96,36.675 63.165,36.675 v1(63.21,36.63) ; 57.17,41.79 56.69,41.79 56.48,41.58 56.48,39.612 59.352,36.74 60.32,36.74 62,35.06 62,32.37 ; 57.17,97.29 57.17,95.497 59.52,93.146 60.488,93.146 60.96,92.675 63.165,92.675 v1(63.21,92.63) ; 57.17,97.79 56.69,97.79 56.48,97.58 56.48,95.612 59.352,92.74 60.32,92.74 62,91.06 62,88.37 ; 57.807,19.047 cw(c59.46,17.394) 59.46,19.732 ; 57.807,75.047 cw(c59.46,73.394) 59.46,75.732 ; 57.82,40.64 57.82,39.421 59.689,37.553 63.09,37.553 63.283,37.36 v1@63.81,37.36 ; 57.82,96.64 57.82,95.421 59.689,93.553 63.09,93.553 63.283,93.36 v1@63.81,93.36 ; 58.154,19.394 cw(c59.46,18.087) 59.46,19.935 ; 58.154,75.394 cw(c59.46,74.087) 59.46,75.935 ; 58.205,37.085 cw(c56.739,35.62) 58.812,35.62 ; 58.205,93.085 cw(c56.739,91.62) 58.812,91.62 ; 58.231,49.24 cw(c57.556,49.24) 58.033,48.763 cw(c58.51,48.286) 58.51,48.961 ; 58.231,105.24 cw(c57.556,105.24) 58.033,104.763 cw(c58.51,104.286) 58.51,104.961 ; 58.32,40.64 58.32,39.496 59.841,37.975 61.995,37.975 62.08,38.06 v1(62.57,38.06) ; 58.32,45.44 58.32,46.31 57.79,46.84 57.79,48.52 58.51,49.24 ; 58.32,96.64 58.32,95.496 59.841,93.975 61.995,93.975 62.08,94.06 v1(62.57,94.06) ; 58.32,101.44 58.32,102.31 57.79,102.84 57.79,104.52 58.51,105.24 ; 58.501,19.741 cw(c59.46,18.781) 59.46,20.138 ; 58.501,75.741 cw(c59.46,74.781) 59.46,76.138 ; 58.514,47.72 60.62,47.72 ; 58.514,103.72 60.62,103.72 ; 58.552,36.738 cw(c57.433,35.62) 59.015,35.62 ; 58.552,92.738 cw(c57.433,91.62) 59.015,91.62 ; 58.579,19.819 ccw(c58.019,20.38) 58.812,20.38 ; 58.579,75.819 ccw(c58.019,76.38) 58.812,76.38 ; 58.659,10.884 ccw(c58.443,11.516) 59.11,11.516 ; 58.659,66.884 ccw(c58.443,67.516) 59.11,67.516 ; 58.712,36.578 ccw(c59.46,37.327) 59.46,36.268 ; 58.712,47.522 cw(c59.189,47.045) 59.189,47.72 cw(c59.189,48.395) 58.712,47.918 ; 58.712,92.578 ccw(c59.46,93.327) 59.46,92.268 ; 58.712,103.522 cw(c59.189,103.045) 59.189,103.72 cw(c59.189,104.395) 58.712,103.918 ; 58.725,10.692 ccw(c58.54,11.231) 59.11,11.231 ; 58.725,66.692 ccw(c58.54,67.231) 59.11,67.231 ; 58.75,10.62 59.11,10.98 59.11,11.44 ; 58.75,66.62 59.11,66.98 59.11,67.44 ; 58.791,10.5 ccw(c58.638,10.946) 59.11,10.946 ; 58.791,66.5 ccw(c58.638,66.946) 59.11,66.946 ; 58.82,40.64 58.82,39.71 v1(60.05,38.48) ; 58.82,96.64 58.82,95.71 v1(60.05,94.48) ; v1@58.86,18.532 cw(c58.86,18.294) 59.028,18.462 cw(c59.196,18.63) v1@58.958,18.63 ; v1(58.86,18.63) 60.07,17.42 62.076,17.42 62.481,17.015 63.09,17.015 64.18,15.925 64.18,15.36 ; v1@58.86,74.532 cw(c58.86,74.294) 59.028,74.462 cw(c59.196,74.63) v1@58.958,74.63 ; v1(58.86,74.63) 60.07,73.42 62.076,73.42 62.481,73.015 63.09,73.015 64.18,71.925 64.18,71.36 ; 58.898,36.392 cw(c58.127,35.62) 59.218,35.62 ; 58.898,92.392 cw(c58.127,91.62) 59.218,91.62 ; 58.916,47.72 cw(c58.916,46.398) 59.85,47.333 ; 58.916,103.72 cw(c58.916,102.398) 59.85,103.333 ; 59.005,11.785 cw(c58.752,11.532) 59.11,11.532 cw(c59.468,11.532) 59.215,11.785 ; 59.005,14.585 cw(c58.752,14.332) 59.11,14.332 cw(c59.468,14.332) 59.215,14.585 ; 59.005,67.785 cw(c58.752,67.532) 59.11,67.532 cw(c59.468,67.532) 59.215,67.785 ; 59.005,70.585 cw(c58.752,70.332) 59.11,70.332 cw(c59.468,70.332) 59.215,70.585 ; 59.11,12.14 59.11,11.44 ; 59.11,14.94 59.11,14.14 58.94,13.97 57.4,13.97 57.21,14.16 57.21,14.94 57.266,14.996 57.266,16.38 57.266,17.75 58.578,19.062 58.656,19.14 v1(59.46,19.14) ; 59.11,68.14 59.11,67.44 ; 59.11,70.94 59.11,70.14 58.94,69.97 57.4,69.97 57.21,70.16 57.21,70.94 57.266,70.996 57.266,72.38 57.266,73.75 58.578,75.062 58.656,75.14 v1(59.46,75.14) ; 59.32,40.64 59.32,40 60.335,38.985 60.84,38.48 v1(61.31,38.48) ; 59.32,96.64 59.32,96 60.335,94.985 60.84,94.48 v1(61.31,94.48) ; v1@59.39,19.07 ccw(c59.222,18.902) 59.222,19.14 ccw(c59.222,19.378) v1@59.39,19.21 ; v1@59.39,75.07 ccw(c59.222,74.902) 59.222,75.14 ccw(c59.222,75.378) v1@59.39,75.21 ; 59.407,47.72 cw(c59.407,46.889) 59.994,47.477 ; 59.407,103.72 cw(c59.407,102.889) 59.994,103.477 ; 59.82,40.64 59.82,40.075 60.91,38.985 61.519,38.985 61.924,38.58 63.93,38.58 v1(65.14,37.37) ; 59.82,96.64 59.82,96.075 60.91,94.985 61.519,94.985 61.924,94.58 63.93,94.58 v1(65.14,93.37) ; v1@59.952,38.48 ccw(c59.714,38.48) 59.882,38.648 ccw(c60.05,38.816) v1@60.05,38.578 ; v1@59.952,94.48 ccw(c59.714,94.48) 59.882,94.648 ccw(c60.05,94.816) v1@60.05,94.578 ; v1@60.11,18.72 v1@60.19,18.64 ; v1@60.11,74.72 v1@60.19,74.64 ; v1(60.12,18.64) v1@60.19,18.64 ; v1(60.12,74.64) v1@60.19,74.64 ; v1@60.19,18.57 cw(c60.358,18.402) 60.358,18.64 cw(c60.358,18.878) v1@60.19,18.71 ; v1@60.19,74.57 cw(c60.358,74.402) 60.358,74.64 cw(c60.358,74.878) v1@60.19,74.71 ; 60.256,12.381 ccw(c59.81,12.84) 60.45,12.84 ; 60.256,68.381 ccw(c59.81,68.84) 60.45,68.84 ; 60.44,15.41 61.2,16.17 62.786,16.17 63.18,15.776 63.18,15.36 ; 60.44,15.789 ccw(c60.44,16.705) 61.088,16.058 ; 60.44,71.41 61.2,72.17 62.786,72.17 63.18,71.776 63.18,71.36 ; 60.44,71.789 ccw(c60.44,72.705) 61.088,72.058 ; 60.45,12.18 60.45,12.84 ; 60.45,68.18 60.45,68.84 ; 60.644,12.381 cw(c61.09,12.84) 60.45,12.84 ; 60.644,68.381 cw(c61.09,68.84) 60.45,68.84 ; 60.719,15.51 cw(c61.153,15.51) 60.846,15.816 ; 60.719,71.51 cw(c61.152,71.51) 60.846,71.816 ; v1(60.79,19.37) 60.835,19.325 63.04,19.325 63.512,18.854 64.48,18.854 66.83,16.503 66.83,14.71 ; v1(60.79,75.37) 60.835,75.325 63.04,75.325 63.512,74.854 64.48,74.854 66.83,72.503 66.83,70.71 ; 60.82,40.64 60.82,40.224 61.214,39.83 62.8,39.83 63.56,40.59 ; 60.82,96.64 60.82,96.224 61.214,95.83 62.8,95.83 63.56,96.59 ; 60.833,40.405 ccw(c61.302,40.405) 60.971,40.073 ; 60.833,96.405 ccw(c61.302,96.405) 60.971,96.073 ; v1@60.86,19.44 ccw(c61.136,19.716) 61.136,19.325 ; v1@60.86,75.44 ccw(c61.136,75.716) 61.136,75.325 ; v1@61.18,14.01 ccw(c61.012,14.178) 61.25,14.178 ccw(c61.488,14.178) v1@61.32,14.01 ; v1@61.18,70.01 ccw(c61.012,70.178) 61.25,70.178 ccw(c61.488,70.178) v1@61.32,70.01 ; v1@61.195,12.564 cw(c61.545,12.219) 61.545,12.71 ; v1@61.195,68.564 cw(c61.545,68.219) 61.545,68.71 ; v1@61.2,12.42 cw(c61.057,12.277) 61.26,12.277 ; v1@61.2,68.42 cw(c61.057,68.277) 61.26,68.277 ; v1@61.24,38.41 ccw(c61.072,38.242) 61.072,38.48 ccw(c61.072,38.718) v1@61.24,38.55 ; v1@61.24,94.41 ccw(c61.072,94.242) 61.072,94.48 ccw(c61.072,94.718) v1@61.24,94.55 ; v1(61.25,13.94) 61.25,14.55 61.41,14.71 62.03,14.71 ; v1(61.25,69.94) 61.25,70.55 61.41,70.71 62.03,70.71 ; 61.26,12.228 cw(c61.532,12.228) v1@61.34,12.42 ; v1@61.26,12.49 61.26,11.59 61.11,11.44 59.11,11.44 ; v1@61.26,12.53 61.44,12.71 62.03,12.71 ccw(c62.03,11.742) v1@61.34,12.421 ; 61.26,68.228 cw(c61.532,68.228) 61.34,68.42 cw(c62.03,67.742) 62.03,68.71 61.44,68.71 v1@61.26,68.53 ; v1@61.26,68.49 61.26,67.59 61.11,67.44 59.11,67.44 ; v1@61.366,12.512 cw(c61.545,12.555) 61.415,12.685 ; v1@61.366,68.512 cw(c61.545,68.555) 61.415,68.685 ; v1(61.43,17.94) 61.92,17.94 62.005,18.025 64.159,18.025 65.68,16.504 65.68,15.36 ; v1(61.43,73.94) 61.92,73.94 62.005,74.025 64.159,74.025 65.68,72.504 65.68,71.36 ; v1@61.5,17.87 cw(c61.668,17.702) 61.668,17.94 cw(c61.668,18.178) v1@61.5,18.01 ; v1@61.5,73.87 cw(c61.668,73.702) 61.668,73.94 cw(c61.668,74.178) v1@61.5,74.01 ; v1@61.9,45.21 cw(c61.732,45.042) 61.97,45.042 cw(c62.208,45.042) v1@62.04,45.21 ; v1@61.9,101.21 cw(c61.732,101.042) 61.97,101.042 cw(c62.208,101.042) v1@62.04,101.21 ; v1@61.96,10.79 ccw(c61.792,10.958) 62.03,10.958 ccw(c62.268,10.958) v1@62.1,10.79 ; v1@61.96,66.79 ccw(c61.792,66.958) 62.03,66.958 ccw(c62.268,66.958) v1@62.1,66.79 ; 61.97,41.29 62.59,41.29 62.75,41.45 v1(62.75,42.06) ; 61.97,42.79 63.18,42.79 63.55,43.16 ; 61.97,44.79 v1(61.97,45.28) ; 61.97,97.29 62.59,97.29 62.75,97.45 v1(62.75,98.06) ; 61.97,98.79 63.18,98.79 63.55,99.16 ; 61.97,100.79 v1(61.97,101.28) ; 62,23.63 62,20.94 63.68,19.26 64.648,19.26 67.52,16.388 67.52,14.42 67.31,14.21 66.83,14.21 ; 62,79.63 62,76.94 63.68,75.26 64.648,75.26 67.52,72.388 67.52,70.42 67.31,70.21 66.83,70.21 ; v1(62.03,10.72) 62.03,11.21 ; 62.03,13.21 60.82,13.21 60.45,12.84 ; v1(62.03,66.72) 62.03,67.21 ; 62.03,69.21 60.82,69.21 60.45,68.84 ; 62.455,43.29 ccw(c62.455,43.781) v1@62.805,43.436 ; 62.455,99.29 ccw(c62.455,99.781) v1@62.805,99.436 ; v1@62.5,37.99 ccw(c62.332,37.822) 62.332,38.06 ccw(c62.332,38.298) v1@62.5,38.13 ; v1@62.5,93.99 ccw(c62.332,93.822) 62.332,94.06 ccw(c62.332,94.298) v1@62.5,94.13 ; 62.585,43.315 ccw(c62.455,43.445) v1@62.634,43.488 ; 62.585,99.315 ccw(c62.455,99.445) v1@62.634,99.488 ; v1@62.66,99.579 cw(c61.97,100.258) 61.97,99.29 62.56,99.29 v1@62.74,99.47 ; v1@62.66,99.58 ccw(c62.468,99.772) 62.74,99.772 ; v1@62.68,41.99 cw(c62.512,41.822) 62.75,41.822 cw(c62.988,41.822) v1@62.82,41.99 ; v1@62.68,97.99 cw(c62.512,97.822) 62.75,97.822 cw(c62.988,97.822) v1@62.82,97.99 ; v1(62.69,17.52) 63.16,17.52 63.665,17.015 64.68,16 64.68,15.36 ; v1(62.69,73.52) 63.16,73.52 63.665,73.015 64.68,72 64.68,71.36 ; v1@62.74,43.47 62.56,43.29 61.97,43.29 ccw(c61.97,44.258) 62.66,43.579 ccw(c62.468,43.772) 62.74,43.772 ; v1@62.74,43.51 62.74,44.41 62.89,44.56 64.89,44.56 ; 62.74,43.723 ccw(c62.943,43.723) v1@62.8,43.58 ; v1@62.74,99.51 62.74,100.41 62.89,100.56 64.89,100.56 ; 62.74,99.723 ccw(c62.943,99.723) v1@62.8,99.58 ; v1@62.76,17.45 cw(c62.928,17.282) 62.928,17.52 cw(c62.928,17.758) v1@62.76,17.59 ; v1@62.76,73.45 cw(c62.928,73.282) 62.928,73.52 cw(c62.928,73.758) v1@62.76,73.59 ; 62.864,36.675 cw(c62.864,36.284) v1@63.14,36.56 ; 62.864,92.675 cw(c62.864,92.284) v1@63.14,92.56 ; 62.912,39.942 cw(c63.56,39.295) 63.56,40.211 ; 62.912,95.942 cw(c63.56,95.295) 63.56,96.211 ; 63.029,15.927 cw(c62.698,15.595) 63.167,15.595 ; 63.029,71.927 cw(c62.698,71.595) 63.167,71.595 ; 63.154,40.184 ccw(c62.847,40.49) 63.281,40.49 ; 63.154,96.184 ccw(c62.847,96.49) 63.281,96.49 ; 63.356,43.619 cw(c62.91,43.16) 63.55,43.16 ; 63.356,99.619 cw(c62.91,99.16) 63.55,99.16 ; 63.379,8.28 65.486,8.28 ; 63.379,64.28 65.486,64.28 ; 63.55,43.82 63.55,43.16 ; 63.55,99.82 63.55,99.16 ; 63.744,43.619 ccw(c64.19,43.16) 63.55,43.16 ; 63.744,99.619 ccw(c64.19,99.16) 63.55,99.16 ; v1@63.81,37.29 ccw(c63.642,37.122) 63.642,37.36 ccw(c63.642,37.598) v1@63.81,37.43 ; v1@63.81,93.29 ccw(c63.642,93.122) 63.642,93.36 ccw(c63.642,93.598) v1@63.81,93.43 ; v1(63.88,37.36) v1@63.81,37.36 ; v1(63.88,93.36) v1@63.81,93.36 ; v1@63.89,37.28 v1@63.81,37.36 ; v1@63.89,93.28 v1@63.81,93.36 ; v1@63.95,17.422 cw(c63.95,17.184) 64.118,17.352 cw(c64.286,17.52) v1@64.048,17.52 ; v1(63.95,17.52) 65.18,16.29 65.18,15.36 ; v1@63.95,73.422 cw(c63.95,73.184) 64.118,73.352 cw(c64.286,73.52) v1@64.048,73.52 ; v1(63.95,73.52) 65.18,72.29 65.18,71.36 ; 64.006,8.523 ccw(c64.593,9.111) 64.593,8.28 ; 64.006,64.523 ccw(c64.593,65.111) 64.593,64.28 ; 64.15,8.667 ccw(c65.084,9.602) 65.084,8.28 ; 64.15,64.667 ccw(c65.084,65.602) 65.084,64.28 ; 64.54,19.732 cw(c64.54,18.673) 65.288,19.422 ; 64.54,20.17 66.79,17.92 v1(67.45,17.92) ; 64.54,35.3 v1(67.31,38.07) ; 64.54,35.862 ccw(c64.54,37.219) 65.499,36.259 ; 64.54,36.065 ccw(c64.54,37.913) 65.846,36.606 ; 64.54,36.268 ccw(c64.54,38.606) 66.193,36.953 ; v1(64.54,36.86) 65.344,36.86 65.422,36.938 66.734,38.25 66.734,39.62 66.734,41.004 66.79,41.06 66.79,41.84 66.6,42.03 65.06,42.03 64.89,41.86 64.89,41.06 ; 64.54,75.732 cw(c64.54,74.673) 65.288,75.422 ; 64.54,76.17 66.79,73.92 v1(67.45,73.92) ; 64.54,91.3 v1(67.31,94.07) ; 64.54,91.862 ccw(c64.54,93.219) 65.499,92.259 ; 64.54,92.065 ccw(c64.54,93.913) 65.846,92.606 ; 64.54,92.268 ccw(c64.54,94.606) 66.193,92.953 ; v1(64.54,92.86) 65.344,92.86 65.422,92.938 66.734,94.25 66.734,95.62 66.734,97.004 66.79,97.06 66.79,97.84 66.6,98.03 65.06,98.03 64.89,97.86 64.89,97.06 ; v1@64.61,36.79 cw(c64.778,36.622) 64.778,36.86 cw(c64.778,37.098) v1@64.61,36.93 ; v1@64.61,92.79 cw(c64.778,92.622) 64.778,92.86 cw(c64.778,93.098) v1@64.61,92.93 ; 64.782,20.38 ccw(c65.873,20.38) 65.102,19.608 ; 64.782,76.38 ccw(c65.873,76.38) 65.102,75.608 ; 64.785,41.415 ccw(c64.532,41.668) 64.89,41.668 ccw(c65.248,41.668) 64.995,41.415 ; 64.785,44.215 ccw(c64.532,44.468) 64.89,44.468 ccw(c65.248,44.468) 64.995,44.215 ; 64.785,97.415 ccw(c64.532,97.668) 64.89,97.668 ccw(c65.248,97.668) 64.995,97.415 ; 64.785,100.215 ccw(c64.532,100.468) 64.89,100.468 ccw(c65.248,100.468) 64.995,100.215 ; 64.89,43.86 64.89,44.56 ; 64.89,44.484 cw(c65.557,44.484) 65.341,45.116 ; 64.89,44.769 cw(c65.46,44.769) 65.275,45.308 ; 64.89,45.054 cw(c65.362,45.054) 65.209,45.5 ; 64.89,99.86 64.89,100.56 ; 64.89,100.484 cw(c65.557,100.484) 65.341,101.116 ; 64.89,100.769 cw(c65.46,100.769) 65.275,101.308 ; 64.89,101.054 cw(c65.362,101.054) 65.209,101.5 ; 64.985,20.38 ccw(c66.567,20.38) 65.448,19.262 ; 64.985,76.38 ccw(c66.567,76.38) 65.448,75.262 ; v1@65.042,37.37 ccw(c64.804,37.37) 64.972,37.538 ccw(c65.14,37.706) v1@65.14,37.468 ; v1@65.042,93.37 ccw(c64.804,93.37) 64.972,93.538 ccw(c65.14,93.706) v1@65.14,93.468 ; 65.188,20.38 ccw(c67.261,20.38) 65.795,18.915 ; 65.188,35.62 cw(c65.981,35.62) 65.421,36.181 ; 65.188,76.38 ccw(c67.261,76.38) 65.795,74.915 ; 65.188,91.62 cw(c65.981,91.62) 65.421,92.181 ; 65.25,45.38 64.89,45.02 64.89,44.56 ; 65.25,101.38 64.89,101.02 64.89,100.56 ; 65.288,8.082 ccw(c64.811,7.605) 64.811,8.28 ccw(c64.811,8.955) 65.288,8.478 ; 65.288,64.082 ccw(c64.811,63.605) 64.811,64.28 ccw(c64.811,64.955) 65.288,64.478 ; 65.49,6.76 66.21,7.48 66.21,9.16 65.68,9.69 65.68,10.56 ; 65.49,7.039 ccw(c65.49,7.714) 65.967,7.237 ccw(c66.444,6.76) 65.769,6.76 ; 65.49,62.76 66.21,63.48 66.21,65.16 65.68,65.69 65.68,66.56 ; 65.49,63.039 ccw(c65.49,63.714) 65.967,63.237 ccw(c66.444,62.76) 65.769,62.76 ; 66.18,15.36 66.18,16.579 64.311,18.447 60.91,18.447 60.717,18.64 v1@60.19,18.64 ; 66.18,71.36 66.18,72.579 64.311,74.447 60.91,74.447 60.717,74.64 v1@60.19,74.64 ; 66.536,39.422 cw(c66.059,38.945) 66.734,38.945 cw(c67.409,38.945) 66.932,39.422 ; 66.536,39.818 ccw(c66.059,40.295) 66.734,40.295 ccw(c67.409,40.295) 66.932,39.818 ; 66.536,95.422 cw(c66.059,94.945) 66.734,94.945 cw(c67.409,94.945) 66.932,95.422 ; 66.536,95.818 ccw(c66.059,96.295) 66.734,96.295 ccw(c67.409,96.295) 66.932,95.818 ; 66.685,41.415 ccw(c66.432,41.668) 66.79,41.668 ccw(c67.148,41.668) 66.895,41.415 ; 66.685,97.415 ccw(c66.432,97.668) 66.79,97.668 ccw(c67.148,97.668) 66.895,97.415 ; 66.734,40.317 cw(c67.283,40.317) 66.895,40.705 ; 66.734,96.317 cw(c67.283,96.317) 66.895,96.705 ; 66.812,8.478 ccw(c66.335,8.955) 67.01,8.955 ccw(c67.685,8.955) 67.208,8.478 ; 66.812,64.478 ccw(c66.335,64.955) 67.01,64.955 ccw(c67.685,64.955) 67.208,64.478 ; 66.83,11.21 66.83,10.52 67.01,10.34 67.01,8.28 ; 66.83,12.21 v1(67.45,12.21) v1@67.52,12.21 ; 66.83,67.21 66.83,66.52 67.01,66.34 67.01,64.28 ; 66.83,68.21 v1(67.45,68.21) v1@67.52,68.21 ; v1@66.92,9.72 cw(c66.704,9.504) 67.01,9.504 ; v1@66.92,9.86 ccw(c66.704,10.076) 67.01,10.076 ; v1@66.92,65.72 cw(c66.704,65.504) 67.01,65.504 ; v1@66.92,65.86 ccw(c66.704,66.076) 67.01,66.076 ; v1@67.212,38.07 cw(c66.974,38.07) 67.142,37.902 cw(c67.31,37.734) v1@67.31,37.972 ; v1@67.212,94.07 cw(c66.974,94.07) 67.142,93.902 cw(c67.31,93.734) v1@67.31,93.972 ; v1@67.38,12.14 ccw(c67.212,11.972) 67.212,12.21 ccw(c67.212,12.448) v1@67.38,12.28 ; v1@67.38,17.85 ccw(c67.212,17.682) 67.212,17.92 ccw(c67.212,18.158) v1@67.38,17.99 ; v1@67.38,68.14 ccw(c67.212,67.972) 67.212,68.21 ccw(c67.212,68.448) v1@67.38,68.28 ; v1@67.38,73.85 ccw(c67.212,73.682) 67.212,73.92 ccw(c67.212,74.158) v1@67.38,73.99 ; v1@68.48,43.79 v1(68.55,43.79) 69.17,43.79 ; v1@68.48,99.79 v1(68.55,99.79) 69.17,99.79 ; v1(68.55,38.08) 69.21,38.08 71.46,35.83 ; v1(68.55,94.08) 69.21,94.08 71.46,91.83 ; v1@68.62,38.01 cw(c68.788,37.842) 68.788,38.08 cw(c68.788,38.318) v1@68.62,38.15 ; v1@68.62,43.72 cw(c68.788,43.552) 68.788,43.79 cw(c68.788,44.028) v1@68.62,43.86 ; v1@68.62,94.01 cw(c68.788,93.842) 68.788,94.08 cw(c68.788,94.318) v1@68.62,94.15 ; v1@68.62,99.72 cw(c68.788,99.552) 68.788,99.79 cw(c68.788,100.028) v1@68.62,99.86 ; v1(68.69,17.93) 71.46,20.7 ; v1@68.69,18.028 ccw(c68.69,18.266) 68.858,18.098 ccw(c69.026,17.93) v1@68.788,17.93 ; v1(68.69,73.93) 71.46,76.7 ; v1@68.69,74.028 ccw(c68.69,74.266) 68.858,74.098 ccw(c69.026,73.93) v1@68.788,73.93 ; 68.792,47.522 cw(c68.315,47.045) 68.99,47.045 cw(c69.665,47.045) 69.188,47.522 ; 68.792,103.522 cw(c68.315,103.045) 68.99,103.045 cw(c69.665,103.045) 69.188,103.522 ; 68.99,45.924 cw(c69.296,45.924) v1@69.08,46.14 ; 68.99,46.496 ccw(c69.296,46.496) v1@69.08,46.28 ; 68.99,47.72 68.99,45.66 69.17,45.48 69.17,44.79 ; 68.99,101.924 cw(c69.296,101.924) v1@69.08,102.14 ; 68.99,102.496 ccw(c69.296,102.496) v1@69.08,102.28 ; 68.99,103.72 68.99,101.66 69.17,101.48 69.17,100.79 ; 69.068,16.182 cw(c68.591,15.705) 69.266,15.705 cw(c69.941,15.705) 69.464,16.182 ; 69.068,16.578 ccw(c68.591,17.055) 69.266,17.055 ccw(c69.941,17.055) 69.464,16.578 ; 69.068,72.182 cw(c68.591,71.705) 69.266,71.705 cw(c69.941,71.705) 69.464,72.182 ; 69.068,72.578 ccw(c68.591,73.055) 69.266,73.055 ccw(c69.941,73.055) 69.464,72.578 ; 69.105,14.585 cw(c68.852,14.332) 69.21,14.332 cw(c69.568,14.332) 69.315,14.585 ; 69.105,15.295 ccw(c68.717,15.683) 69.266,15.683 ; 69.105,70.585 cw(c68.852,70.332) 69.21,70.332 cw(c69.568,70.332) 69.315,70.585 ; 69.105,71.295 ccw(c68.717,71.683) 69.266,71.683 ; 69.17,41.29 69.17,39.497 71.52,37.146 72.488,37.146 72.96,36.675 75.165,36.675 v1(75.21,36.63) ; 69.17,41.79 68.69,41.79 68.48,41.58 68.48,39.612 71.352,36.74 72.32,36.74 74,35.06 74,32.37 ; 69.17,97.29 69.17,95.497 71.52,93.146 72.488,93.146 72.96,92.675 75.165,92.675 v1(75.21,92.63) ; 69.17,97.79 68.69,97.79 68.48,97.58 68.48,95.612 71.352,92.74 72.32,92.74 74,91.06 74,88.37 ; 69.807,19.047 cw(c71.46,17.394) 71.46,19.732 ; 69.807,75.047 cw(c71.46,73.394) 71.46,75.732 ; 69.82,40.64 69.82,39.421 71.689,37.553 75.09,37.553 75.283,37.36 v1@75.81,37.36 ; 69.82,96.64 69.82,95.421 71.689,93.553 75.09,93.553 75.283,93.36 v1@75.81,93.36 ; 70.154,19.394 cw(c71.46,18.087) 71.46,19.935 ; 70.154,75.394 cw(c71.46,74.087) 71.46,75.935 ; 70.205,37.085 cw(c68.739,35.62) 70.812,35.62 ; 70.205,93.085 cw(c68.739,91.62) 70.812,91.62 ; 70.231,49.24 cw(c69.556,49.24) 70.033,48.763 cw(c70.51,48.286) 70.51,48.961 ; 70.231,105.24 cw(c69.556,105.24) 70.033,104.763 cw(c70.51,104.286) 70.51,104.961 ; 70.32,40.64 70.32,39.496 71.841,37.975 73.995,37.975 74.08,38.06 v1(74.57,38.06) ; 70.32,45.44 70.32,46.31 69.79,46.84 69.79,48.52 70.51,49.24 ; 70.32,96.64 70.32,95.496 71.841,93.975 73.995,93.975 74.08,94.06 v1(74.57,94.06) ; 70.32,101.44 70.32,102.31 69.79,102.84 69.79,104.52 70.51,105.24 ; 70.501,19.741 cw(c71.46,18.781) 71.46,20.138 ; 70.501,75.741 cw(c71.46,74.781) 71.46,76.138 ; 70.514,47.72 72.62,47.72 ; 70.514,103.72 72.62,103.72 ; 70.552,36.738 cw(c69.433,35.62) 71.015,35.62 ; 70.552,92.738 cw(c69.433,91.62) 71.015,91.62 ; 70.579,19.819 ccw(c70.019,20.38) 70.812,20.38 ; 70.579,75.819 ccw(c70.019,76.38) 70.812,76.38 ; 70.659,10.884 ccw(c70.443,11.516) 71.11,11.516 ; 70.659,66.884 ccw(c70.443,67.516) 71.11,67.516 ; 70.712,36.578 ccw(c71.46,37.327) 71.46,36.268 ; 70.712,47.522 cw(c71.189,47.045) 71.189,47.72 cw(c71.189,48.395) 70.712,47.918 ; 70.712,92.578 ccw(c71.46,93.327) 71.46,92.268 ; 70.712,103.522 cw(c71.189,103.045) 71.189,103.72 cw(c71.189,104.395) 70.712,103.918 ; 70.725,10.692 ccw(c70.54,11.231) 71.11,11.231 ; 70.725,66.692 ccw(c70.54,67.231) 71.11,67.231 ; 70.75,10.62 71.11,10.98 71.11,11.44 ; 70.75,66.62 71.11,66.98 71.11,67.44 ; 70.791,10.5 ccw(c70.638,10.946) 71.11,10.946 ; 70.791,66.5 ccw(c70.638,66.946) 71.11,66.946 ; 70.82,40.64 70.82,39.71 v1(72.05,38.48) ; 70.82,96.64 70.82,95.71 v1(72.05,94.48) ; v1@70.86,18.532 cw(c70.86,18.294) 71.028,18.462 cw(c71.196,18.63) v1@70.958,18.63 ; v1(70.86,18.63) 72.07,17.42 74.076,17.42 74.481,17.015 75.09,17.015 76.18,15.925 76.18,15.36 ; v1@70.86,74.532 cw(c70.86,74.294) 71.028,74.462 cw(c71.196,74.63) v1@70.958,74.63 ; v1(70.86,74.63) 72.07,73.42 74.076,73.42 74.481,73.015 75.09,73.015 76.18,71.925 76.18,71.36 ; 70.898,36.392 cw(c70.127,35.62) 71.218,35.62 ; 70.898,92.392 cw(c70.127,91.62) 71.218,91.62 ; 70.916,47.72 cw(c70.916,46.398) 71.85,47.333 ; 70.916,103.72 cw(c70.916,102.398) 71.85,103.333 ; 71.005,11.785 cw(c70.752,11.532) 71.11,11.532 cw(c71.468,11.532) 71.215,11.785 ; 71.005,14.585 cw(c70.752,14.332) 71.11,14.332 cw(c71.468,14.332) 71.215,14.585 ; 71.005,67.785 cw(c70.752,67.532) 71.11,67.532 cw(c71.468,67.532) 71.215,67.785 ; 71.005,70.585 cw(c70.752,70.332) 71.11,70.332 cw(c71.468,70.332) 71.215,70.585 ; 71.11,12.14 71.11,11.44 ; 71.11,14.94 71.11,14.14 70.94,13.97 69.4,13.97 69.21,14.16 69.21,14.94 69.266,14.996 69.266,16.38 69.266,17.75 70.578,19.062 70.656,19.14 v1(71.46,19.14) ; 71.11,68.14 71.11,67.44 ; 71.11,70.94 71.11,70.14 70.94,69.97 69.4,69.97 69.21,70.16 69.21,70.94 69.266,70.996 69.266,72.38 69.266,73.75 70.578,75.062 70.656,75.14 v1(71.46,75.14) ; 71.32,40.64 71.32,40 72.335,38.985 72.84,38.48 v1(73.31,38.48) ; 71.32,96.64 71.32,96 72.335,94.985 72.84,94.48 v1(73.31,94.48) ; v1@71.39,19.07 ccw(c71.222,18.902) 71.222,19.14 ccw(c71.222,19.378) v1@71.39,19.21 ; v1@71.39,75.07 ccw(c71.222,74.902) 71.222,75.14 ccw(c71.222,75.378) v1@71.39,75.21 ; 71.407,47.72 cw(c71.407,46.889) 71.994,47.477 ; 71.407,103.72 cw(c71.407,102.889) 71.994,103.477 ; 71.82,40.64 71.82,40.075 72.91,38.985 73.519,38.985 73.924,38.58 75.93,38.58 v1(77.14,37.37) ; 71.82,96.64 71.82,96.075 72.91,94.985 73.519,94.985 73.924,94.58 75.93,94.58 v1(77.14,93.37) ; v1@71.952,38.48 ccw(c71.714,38.48) 71.882,38.648 ccw(c72.05,38.816) v1@72.05,38.578 ; v1@71.952,94.48 ccw(c71.714,94.48) 71.882,94.648 ccw(c72.05,94.816) v1@72.05,94.578 ; v1@72.11,18.72 v1@72.19,18.64 ; v1@72.11,74.72 v1@72.19,74.64 ; v1(72.12,18.64) v1@72.19,18.64 ; v1(72.12,74.64) v1@72.19,74.64 ; v1@72.19,18.57 cw(c72.358,18.402) 72.358,18.64 cw(c72.358,18.878) v1@72.19,18.71 ; v1@72.19,74.57 cw(c72.358,74.402) 72.358,74.64 cw(c72.358,74.878) v1@72.19,74.71 ; 72.256,12.381 ccw(c71.81,12.84) 72.45,12.84 ; 72.256,68.381 ccw(c71.81,68.84) 72.45,68.84 ; 72.44,15.41 73.2,16.17 74.786,16.17 75.18,15.776 75.18,15.36 ; 72.44,15.789 ccw(c72.44,16.705) 73.088,16.058 ; 72.44,71.41 73.2,72.17 74.786,72.17 75.18,71.776 75.18,71.36 ; 72.44,71.789 ccw(c72.44,72.705) 73.088,72.058 ; 72.45,12.18 72.45,12.84 ; 72.45,68.18 72.45,68.84 ; 72.644,12.381 cw(c73.09,12.84) 72.45,12.84 ; 72.644,68.381 cw(c73.09,68.84) 72.45,68.84 ; 72.719,15.51 cw(c73.153,15.51) 72.846,15.816 ; 72.719,71.51 cw(c73.152,71.51) 72.846,71.816 ; v1(72.79,19.37) 72.835,19.325 75.04,19.325 75.512,18.854 76.48,18.854 78.83,16.503 78.83,14.71 ; v1(72.79,75.37) 72.835,75.325 75.04,75.325 75.512,74.854 76.48,74.854 78.83,72.503 78.83,70.71 ; 72.82,40.64 72.82,40.224 73.214,39.83 74.8,39.83 75.56,40.59 ; 72.82,96.64 72.82,96.224 73.214,95.83 74.8,95.83 75.56,96.59 ; 72.833,40.405 ccw(c73.302,40.405) 72.971,40.073 ; 72.833,96.405 ccw(c73.302,96.405) 72.971,96.073 ; v1@72.86,19.44 ccw(c73.136,19.716) 73.136,19.325 ; v1@72.86,75.44 ccw(c73.136,75.716) 73.136,75.325 ; v1@73.18,14.01 ccw(c73.012,14.178) 73.25,14.178 ccw(c73.488,14.178) v1@73.32,14.01 ; v1@73.18,70.01 ccw(c73.012,70.178) 73.25,70.178 ccw(c73.488,70.178) v1@73.32,70.01 ; v1@73.195,12.564 cw(c73.545,12.219) 73.545,12.71 ; v1@73.195,68.564 cw(c73.545,68.219) 73.545,68.71 ; v1@73.2,12.42 cw(c73.057,12.277) 73.26,12.277 ; v1@73.2,68.42 cw(c73.057,68.277) 73.26,68.277 ; v1@73.24,38.41 ccw(c73.072,38.242) 73.072,38.48 ccw(c73.072,38.718) v1@73.24,38.55 ; v1@73.24,94.41 ccw(c73.072,94.242) 73.072,94.48 ccw(c73.072,94.718) v1@73.24,94.55 ; v1(73.25,13.94) 73.25,14.55 73.41,14.71 74.03,14.71 ; v1(73.25,69.94) 73.25,70.55 73.41,70.71 74.03,70.71 ; 73.26,12.228 cw(c73.532,12.228) v1@73.34,12.42 ; v1@73.26,12.49 73.26,11.59 73.11,11.44 71.11,11.44 ; v1@73.26,12.53 73.44,12.71 74.03,12.71 ccw(c74.03,11.742) v1@73.34,12.421 ; 73.26,68.228 cw(c73.532,68.228) 73.34,68.42 cw(c74.03,67.742) 74.03,68.71 73.44,68.71 v1@73.26,68.53 ; v1@73.26,68.49 73.26,67.59 73.11,67.44 71.11,67.44 ; v1@73.366,12.512 cw(c73.545,12.555) 73.415,12.685 ; v1@73.366,68.512 cw(c73.545,68.555) 73.415,68.685 ; v1(73.43,17.94) 73.92,17.94 74.005,18.025 76.159,18.025 77.68,16.504 77.68,15.36 ; v1(73.43,73.94) 73.92,73.94 74.005,74.025 76.159,74.025 77.68,72.504 77.68,71.36 ; v1@73.5,17.87 cw(c73.668,17.702) 73.668,17.94 cw(c73.668,18.178) v1@73.5,18.01 ; v1@73.5,73.87 cw(c73.668,73.702) 73.668,73.94 cw(c73.668,74.178) v1@73.5,74.01 ; v1@73.9,45.21 cw(c73.732,45.042) 73.97,45.042 cw(c74.208,45.042) v1@74.04,45.21 ; v1@73.9,101.21 cw(c73.732,101.042) 73.97,101.042 cw(c74.208,101.042) v1@74.04,101.21 ; v1@73.96,10.79 ccw(c73.792,10.958) 74.03,10.958 ccw(c74.268,10.958) v1@74.1,10.79 ; v1@73.96,66.79 ccw(c73.792,66.958) 74.03,66.958 ccw(c74.268,66.958) v1@74.1,66.79 ; 73.97,41.29 74.59,41.29 74.75,41.45 v1(74.75,42.06) ; 73.97,42.79 75.18,42.79 75.55,43.16 ; 73.97,44.79 v1(73.97,45.28) ; 73.97,97.29 74.59,97.29 74.75,97.45 v1(74.75,98.06) ; 73.97,98.79 75.18,98.79 75.55,99.16 ; 73.97,100.79 v1(73.97,101.28) ; 74,23.63 74,20.94 75.68,19.26 76.648,19.26 79.52,16.388 79.52,14.42 79.31,14.21 78.83,14.21 ; 74,79.63 74,76.94 75.68,75.26 76.648,75.26 79.52,72.388 79.52,70.42 79.31,70.21 78.83,70.21 ; v1(74.03,10.72) 74.03,11.21 ; 74.03,13.21 72.82,13.21 72.45,12.84 ; v1(74.03,66.72) 74.03,67.21 ; 74.03,69.21 72.82,69.21 72.45,68.84 ; 74.455,43.29 ccw(c74.455,43.781) v1@74.805,43.436 ; 74.455,99.29 ccw(c74.455,99.781) v1@74.805,99.436 ; v1@74.5,37.99 ccw(c74.332,37.822) 74.332,38.06 ccw(c74.332,38.298) v1@74.5,38.13 ; v1@74.5,93.99 ccw(c74.332,93.822) 74.332,94.06 ccw(c74.332,94.298) v1@74.5,94.13 ; 74.585,43.315 ccw(c74.455,43.445) v1@74.634,43.488 ; 74.585,99.315 ccw(c74.455,99.445) v1@74.634,99.488 ; v1@74.66,43.579 cw(c73.97,44.258) 73.97,43.29 74.56,43.29 v1@74.74,43.47 ; v1@74.66,99.579 cw(c73.97,100.258) 73.97,99.29 74.56,99.29 v1@74.74,99.47 ; v1@74.66,43.58 ccw(c74.468,43.772) 74.74,43.772 ; v1@74.66,99.58 ccw(c74.468,99.772) 74.74,99.772 ; v1@74.68,41.99 cw(c74.512,41.822) 74.75,41.822 cw(c74.988,41.822) v1@74.82,41.99